# Altium PCB MotherBoard.PcbDoc (part 1 of 2)
Units mil, origin at the board's own origin, x right, y up, seen from the top; angles counter-clockwise.
Board outline 4401.57 x 4960.63 mil, 2 copper layers (Top Layer, Bottom Layer), stack 63.356 mil thick; 74 components, 103 nets, 405 pads, 142 vias.
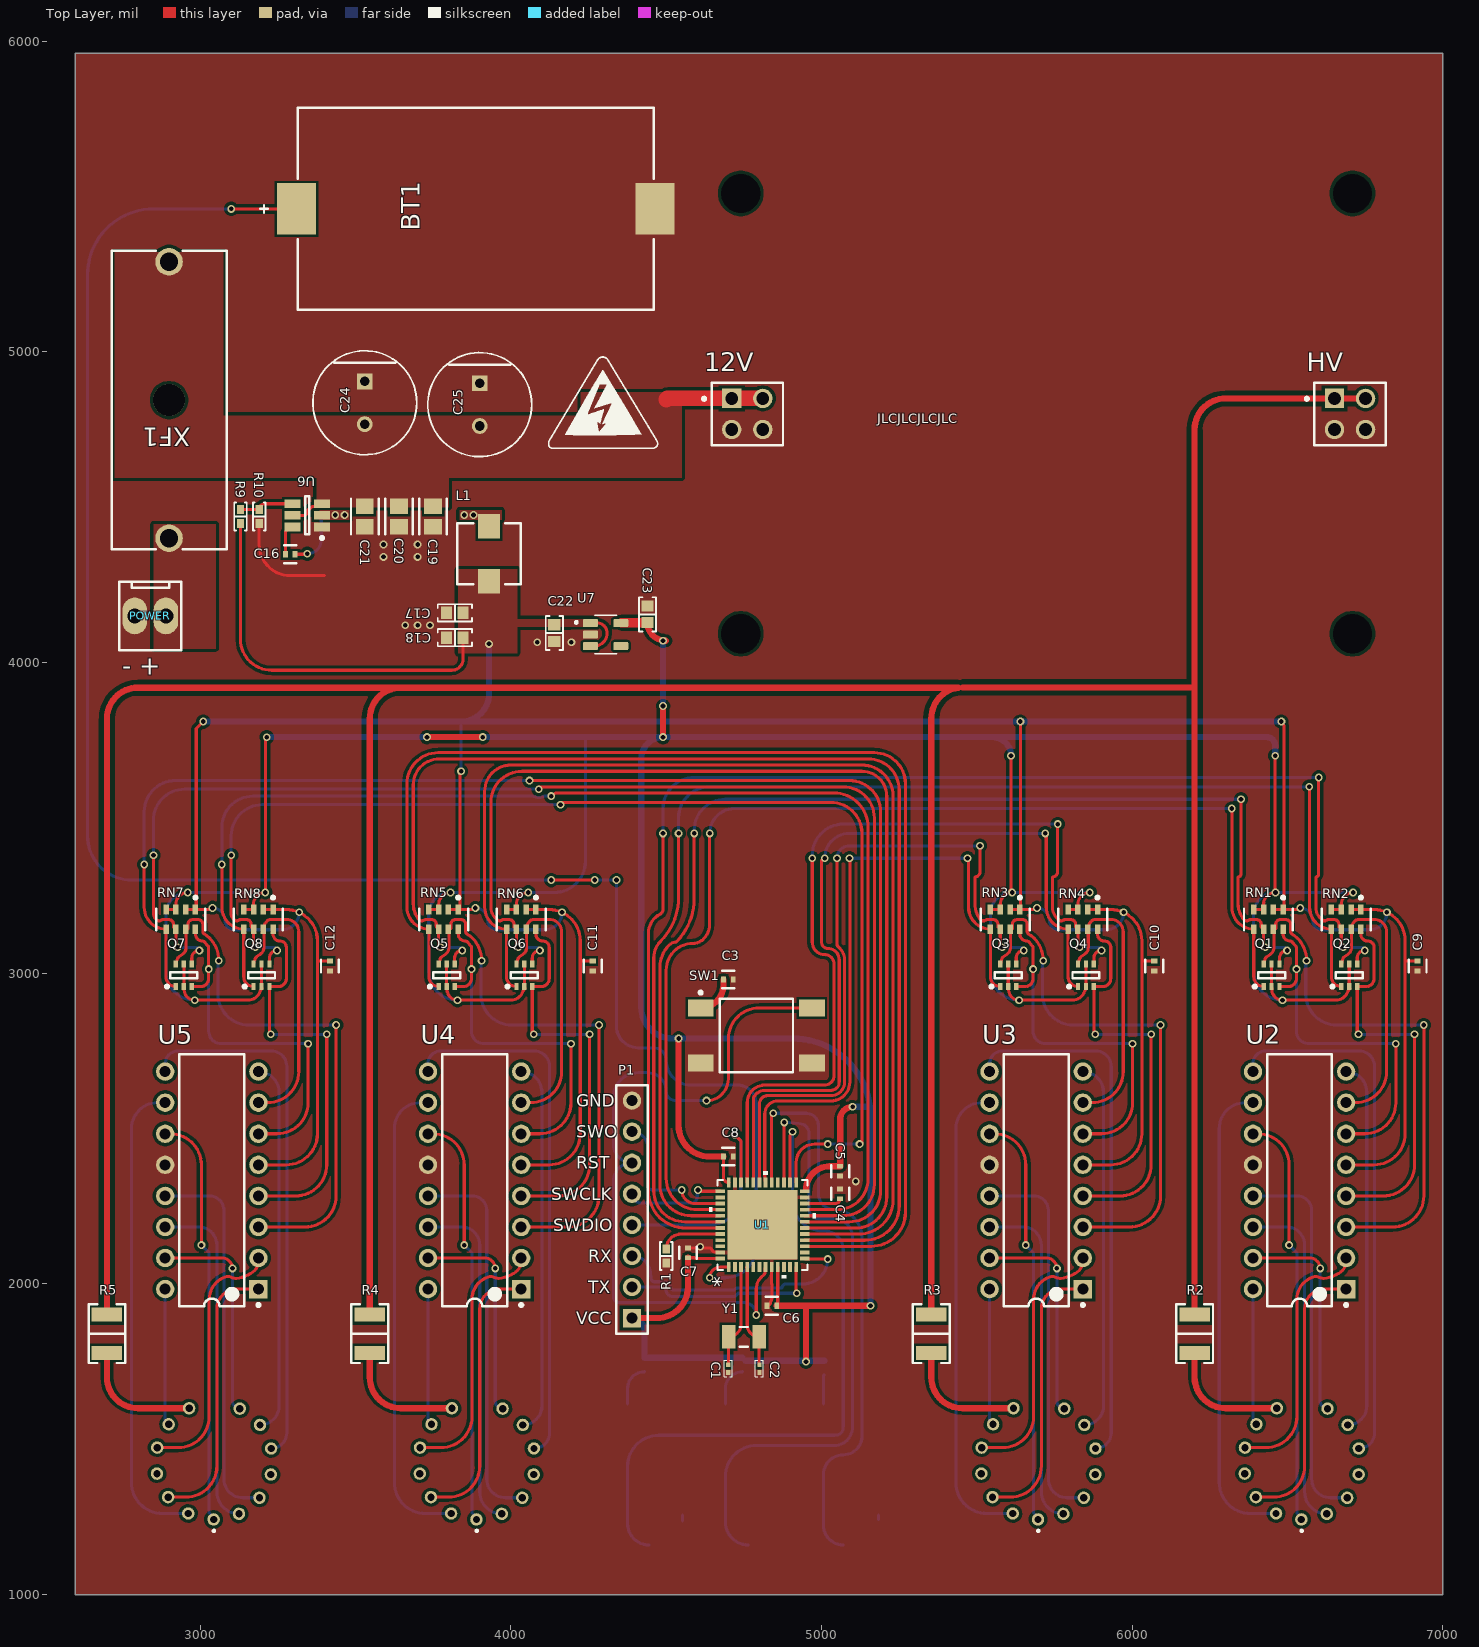
[diagram p0: Top Layer view]
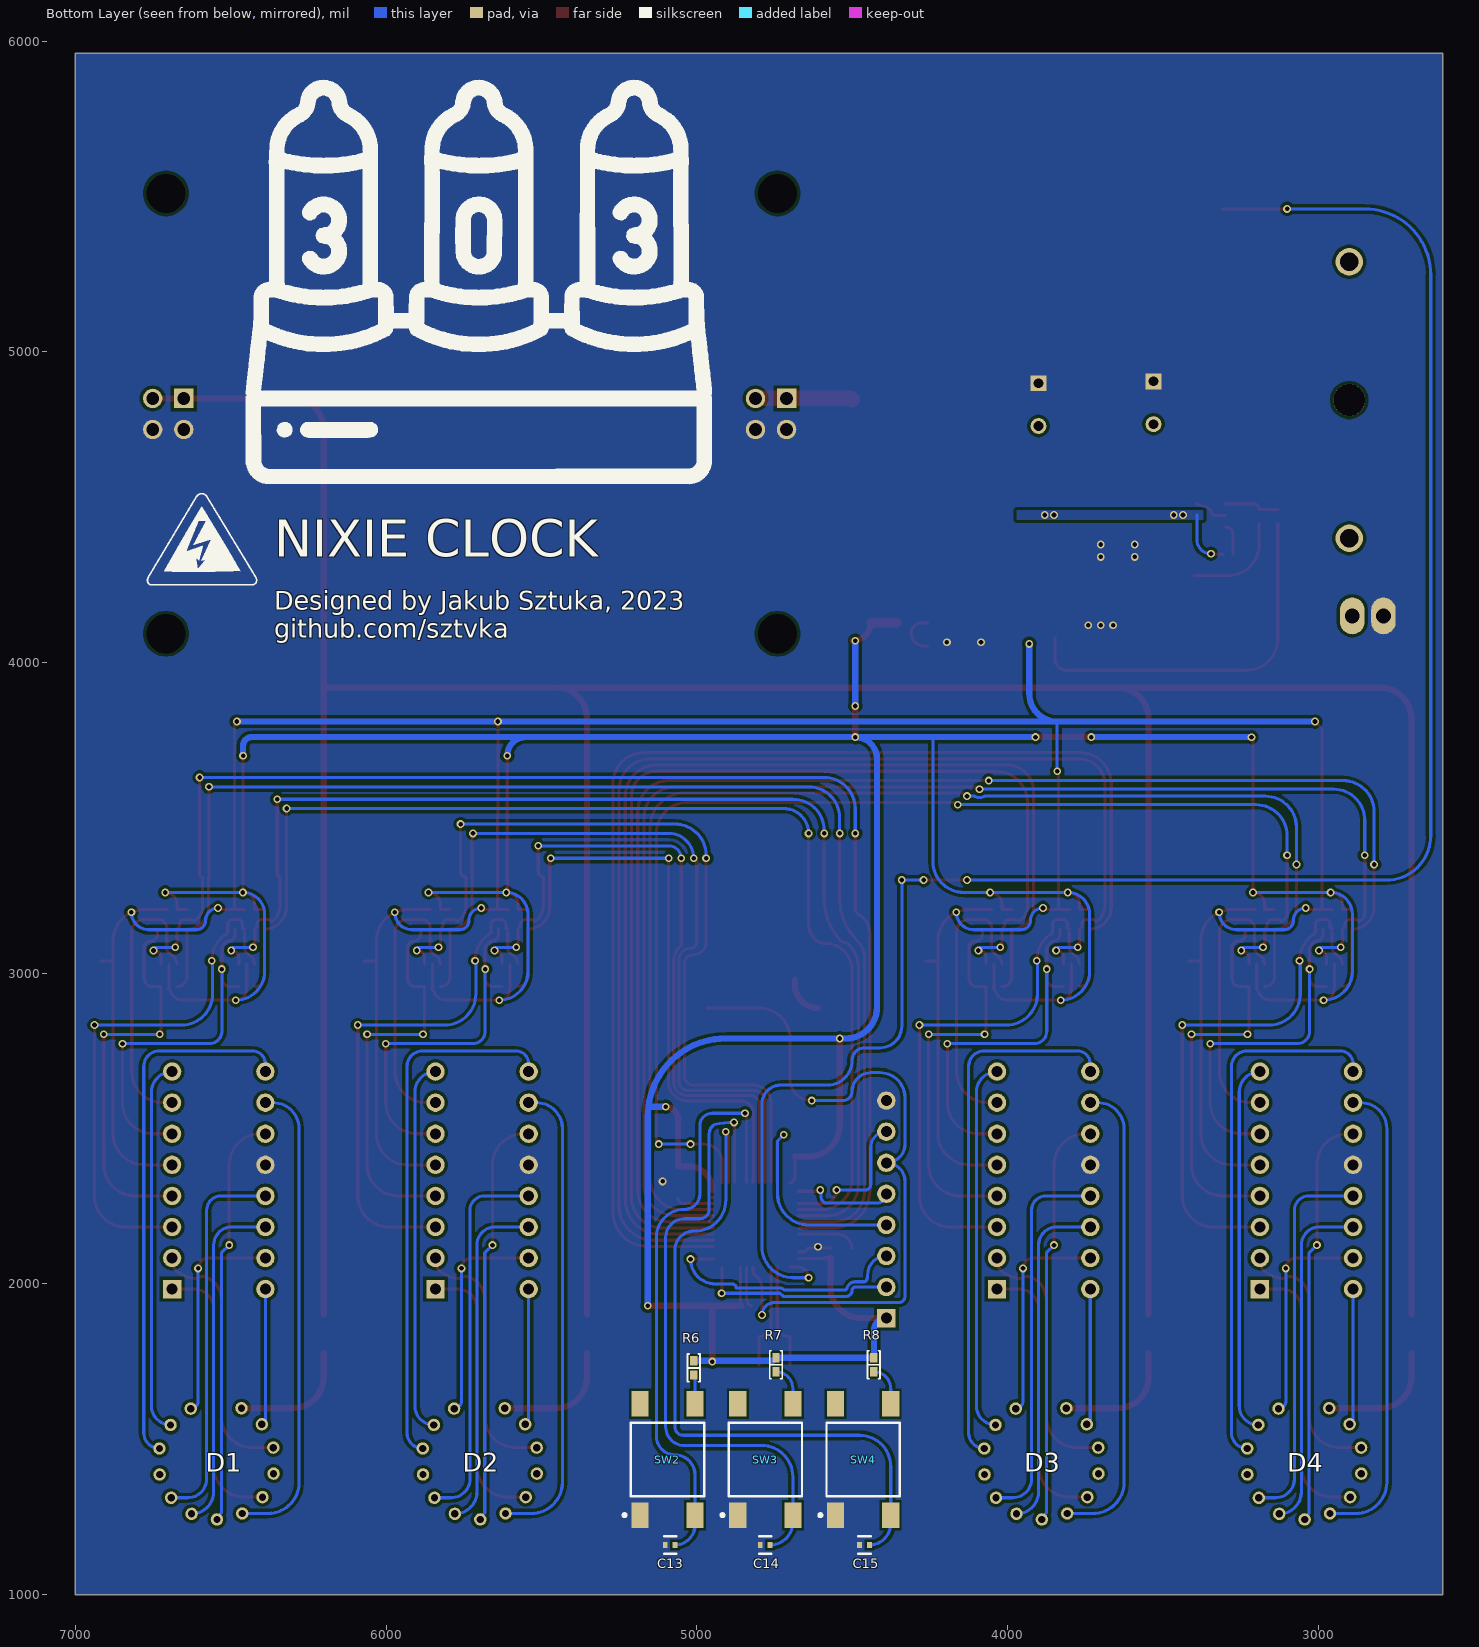
[diagram p1: Bottom Layer view, seen from below]

## Layer stack, top to bottom
Top Solder: solder mask 0.4, Solder Resist, Dk 3.5
Top Layer: signal copper 1.378
Dielectric 2: core 24, Core-038, Dk 4.6
Dielectric 1: dielectric 12.6, FR-4, Dk 4.8
Dielectric 3: core 24, Core-038, Dk 4.6
Bottom Layer: signal copper 1.378
Bottom Solder: solder mask 0.4, Solder Resist, Dk 3.5

## Board outline
2598.43,1000 7000,1000 7000,5960.63 2598.43,5960.63

## Design rules (kind name [scope] priority, off if disabled: settings)
Clearance STM_1 [InComponent('U1') Or InComponentClass('STM32') vs InComponent('U1') Or InComponentClass('STM32')] p1: gap=5 ignorepadtopadclearanceinfootprint=TRUE
Clearance HV_Clearance [(InNet('HV') OR HasFootprint('Z5730M'))] p2: gap=10 ignorepadtopadclearanceinfootprint=FALSE except(0: Arc-Hole Track-Hole SMDPad-Hole THPad-Hole Via-Hole Fill-Hole Poly-Hole Region-Hole Text-Hole; 15: Arc-Arc Arc-Track Arc-SMDPad Arc-THPad Arc-Via Arc-Fill Arc-Poly Arc-Region Track-Track Track-SMDPad Track-THPad Track-Via Track-Fill Track-Poly Track-Region)
Clearance [All] p3: gap=10 ignorepadtopadclearanceinfootprint=FALSE except(0: Arc-Hole Track-Hole SMDPad-Hole THPad-Hole Via-Hole Fill-Hole Poly-Hole Region-Hole Text-Hole; 7: Arc-Arc Arc-Track Arc-SMDPad Track-Track Track-SMDPad SMDPad-SMDPad SMDPad-Fill SMDPad-Poly SMDPad-Region; 15: Fill-Text Poly-Text Region-Text)
HoleSize [All] p1: absolutevalues=TRUE maxlimit=500 minlimit=1 maxpercent=80.000 minpercent=20.000
MinimumSolderMaskSliver [All] p1: minsoldermaskwidth=3
PolygonConnect [All] p1: connectstyle=Direct reliefconductorwidth=10 reliefentries=4 polygonreliefangle="90 Angle" airgapwidth=10
RoomDefinition STM32 [InComponentClass('STM32') And Not InComponent('BT1')] p1: confinementstyle=ConfineIn formatcopy=TRUE lockcomponents=FALSE outline 5280,1040 5280,3612.2 4320,3612.2 4320,1040
RoomDefinition STM-BAT [InComponent('BT1')] p2: confinementstyle=ConfineIn formatcopy=TRUE lockcomponents=FALSE outline 3110,5040 4600,5040 4600,5860 3110,5860
RoomDefinition Power [InComponentClass('Power')] p3: confinementstyle=ConfineIn formatcopy=TRUE lockcomponents=FALSE outline 7000,5610 2660,5610 2660,3948.9 7000,3948.9
RoomDefinition NIXIE_3 [InComponentClass('NIXIE_3')] p4: confinementstyle=ConfineIn formatcopy=TRUE lockcomponents=FALSE outline 3475.91,1043.39 4307.17,1043.39 4307.17,3380 3475.91,3380
RoomDefinition NIXIE_4 [InComponentClass('NIXIE_4')] p5: confinementstyle=ConfineIn formatcopy=TRUE lockcomponents=FALSE outline 2630,1043.39 3461.26,1043.39 3461.26,3380 2630,3380
RoomDefinition NIXIE_2 [InComponentClass('NIXIE_2')] p6: confinementstyle=ConfineIn formatcopy=TRUE lockcomponents=FALSE outline 5283.31,1043.39 6114.57,1043.39 6114.57,3380 5283.31,3380
RoomDefinition NIXIE_1 [InComponentClass('NIXIE_1')] p7: confinementstyle=ConfineIn formatcopy=TRUE lockcomponents=FALSE outline 6130.79,1043.39 6962.05,1043.39 6962.05,3380 6130.79,3380
RoutingVias [All] p1: holewidth=15 width=25 viastyle="Through Hole" minholewidth=15 minwidth=25 maxholewidth=28 maxwidth=50
SilkToSilkClearance [All] p1: silktosilkclearance=4
SilkToSolderMaskClearance [IsPad] p1: minsilkscreentomaskgap=3.8 clearancetoexposedcopper=TRUE
SolderMaskExpansion [All] p1: expansion=4 istentingtop=FALSE
Width [All] p1: maxlimit=50 minlimit=10 preferedwidth=10
26 further rules are at their usual default settings.

## Classes and differential pairs
component class STM32: BT1 C1 C2 C3 C4 C5 C6 C7 C8 C13 C14 C15 P1 R1 R6 R7 R8 SW1 SW2 SW3 SW4 U1 Y1
component class Power: 12V C16 C17 C18 C19 C20 C21 C22 C23 C24 C25 HV L1 POWER R9 R10 U6 U7 XF1
component class NIXIE_4: C12 D4 Q7 Q8 R5 RN7 RN8 U5
component class NIXIE_3: C11 D3 Q5 Q6 R4 RN5 RN6 U4
component class NIXIE_2: C10 D2 Q3 Q4 R3 RN3 RN4 U3
component class NIXIE_1: C9 D1 Q1 Q2 R2 RN1 RN2 U2

## Components (designator, comment, footprint, x,y, rotation, side; value= is the part's Value field where it differs from the comment)
12V "SSW-102-02-G-D" FP-SSW-102-02-G-D-MFG 4760.94,4799.92 r180 top (schematic designator J2)
BT1 "CR2032-BS-6-1" FP-BU2032SM-BT-GTR-MFG 3886.77,5460 r0 top
C1 "10 pF" "CAP 0201_0603" 4700,1727.8 r270 top
C2 "10 pF" "CAP 0201_0603" 4800,1727.8 r270 top
C3 "100nF" FP-C1005-050-0_15-MFG 4700,2980 r180 top
C4 "4.7uF" FP-C1005-050-0_15-MFG 5060,2290 r90 top
C5 "100nF" FP-C1005-050-0_15-MFG 5060,2363 r90 top
C6 "100nF" FP-C1005-050-0_15-MFG 4840,1930 r0 top
C7 "100nF" FP-C1005-050-0_15-MFG 4570,2100 r270 top
C8 "100nF" FP-C1005-050-0_15-MFG 4700,2410 r180 top
C9 "100nF" FP-C1005-050-0_15-MFG 6918.43,3023.39 r90 top
C10 "100nF" FP-C1005-050-0_15-MFG 6070.94,3023.39 r90 top
C11 "100nF" FP-C1005-050-0_15-MFG 4263.54,3023.39 r90 top
C12 "100nF" FP-C1005-050-0_15-MFG 3417.64,3023.39 r90 top
C13 "100nF" FP-C1005-050-0_15-MFG 5085.75,1160 r0 bottom
C14 "100nF" FP-C1005-050-0_15-MFG 4780,1160 r0 bottom
C15 "100nF" FP-C1005-050-0_15-MFG 4460,1160 r0 bottom
C16 "100nF" FP-C1005-050-0_15-MFG 3290,4348.42 r0 top
C17 "22uF" "CAP 0603_1608" 3820,4160 r0 top
C18 "22uF" "CAP 0603_1608" 3820,4080 r0 top
C19 "10uF" FP-CL21-IPC_B 3750,4470 r270 top
C20 "10uF" FP-CL21-IPC_B 3640,4470 r270 top
C21 "10uF" FP-CL21-IPC_B 3530,4470 r270 top
C22 "1uF" "CAP 0603_1608" 4140,4095 r90 top
C23 "1uF" "CAP 0603_1608" 4440,4155 r270 top
C24 "470uF" FP-RAD-TH-D_8_0_5-L_15_1-MFG 3530,4836.09 r270 top
C25 "470uF" FP-RAD-TH-D_8_0_5-L_15_1-MFG 3900,4830 r270 top
D1 "Z5730M" Z5730M 6545.65,1430.08 r180 bottom
D2 "Z5730M" Z5730M 5698.17,1430.08 r180 bottom
D3 "Z5730M" Z5730M 3890.77,1430.08 r180 bottom
D4 "Z5730M" Z5730M 3044.86,1430.08 r180 bottom
HV "SSW-102-02-G-D" FP-SSW-102-02-G-D-MFG 6700.94,4799.92 r180 top (schematic designator J1)
L1 "3.3 µH" "BOURNS SRP5030T" 3930,4350 r270 top
P1 "Header 8" HDR1X8 4390,1890 r90 top
POWER "POWER" "MOLEX KK 0022272021" 2840,4150 r180 top (schematic designator J3)
Q1 "PMGD780SN,115" NXP-SOT363_N 6448.43,2993.39 r90 top
Q2 "PMGD780SN,115" NXP-SOT363_N 6698.43,2993.39 r90 top
Q3 "PMGD780SN,115" NXP-SOT363_N 5600.94,2993.39 r90 top
Q4 "PMGD780SN,115" NXP-SOT363_N 5850.94,2993.39 r90 top
Q5 "PMGD780SN,115" NXP-SOT363_N 3793.54,2993.39 r90 top
Q6 "PMGD780SN,115" NXP-SOT363_N 4043.54,2993.39 r90 top
Q7 "PMGD780SN,115" NXP-SOT363_N 2947.64,2993.39 r90 top
Q8 "PMGD780SN,115" NXP-SOT363_N 3197.64,2993.39 r90 top
R1 "10 kOhms" "RES 0402_1005" 4500,2090 r90 top
R2 "20 kOhms" "RES 1210_3225" 6200.79,1840 r270 top
R3 "20 kOhms" "RES 1210_3225" 5353.31,1840 r270 top
R4 "20 kOhms" "RES 1210_3225" 3545.91,1840 r270 top
R5 "20 kOhms" "RES 1210_3225" 2700,1840 r270 top
R6 "10 kOhms" "RES 0402_1005" 5010,1730 r90 bottom
R7 "10 kOhms" "RES 0402_1005" 4745,1740 r90 bottom
R8 "10 kOhms" "RES 0402_1005" 4430,1740 r90 bottom
R9 "56.2 kOhms" "RES 0402_1005" 3130,4470 r270 top
R10 "10 kOhms" "RES 0402_1005" 3190,4470 r90 top
RN1 "10k 0603x4" FP-EXB38V-MFG 6438.43,3173.39 r180 top
RN2 "10k 0603x4" FP-EXB38V-MFG 6688.43,3173.39 r180 top
RN3 "10k 0603x4" FP-EXB38V-MFG 5590.94,3173.39 r180 top
RN4 "10k 0603x4" FP-EXB38V-MFG 5840.94,3173.39 r180 top
RN5 "10k 0603x4" FP-EXB38V-MFG 3783.54,3173.39 r180 top
RN6 "10k 0603x4" FP-EXB38V-MFG 4033.54,3173.39 r180 top
RN7 "10k 0603x4" FP-EXB38V-MFG 2937.64,3173.39 r180 top
RN8 "10k 0603x4" FP-EXB38V-MFG 3187.64,3173.39 r180 top
SW1 "FSM6JSMA" TECO-FSM6JSMA_V 4790,2800 r90 top
SW2 "FSM6JSMA" TECO-FSM6JSMA_V 5094.41,1435 r0 bottom
SW3 "FSM6JSMA" TECO-FSM6JSMA_V 4779.41,1435 r0 bottom
SW4 "FSM6JSMA" TECO-FSM6JSMA_V 4464.41,1435 r0 bottom
U1 "STM32F411CCU6TR" UFQFPN-48_7X7X0P55MM 4810,2190 r90 top
U2 "74141" DIP-16 6538.43,2333.39 r180 top
U3 "74141" DIP-16 5690.94,2333.39 r180 top
U4 "74141" DIP-16 3883.54,2333.39 r180 top
U5 "74141" DIP-16 3037.64,2333.39 r180 top
U6 "TPS563201DDCR" SOT23-6_M 3345,4473.58 r180 top
U7 "RT9013-33GB" RT9013 4305,4090 r0 top
XF1 "PTF-77" 696107003002 2900,4844.88 r90 top
Y1 "ABS07-32.768KHZ-7-T" FP-ABS07-MFG 4750,1830 r180 top

## Footprints (in the part's own frame and the unit in brackets; to place one, negate y for a bottom-side part, rotate by r counter-clockwise, add the part's x,y. Pads: shape width x height; smd on the part's side, far side on the other; paste and mask are expansions set on the pad)
696107003002 [mm] "FUSEHOLDER BLOCKS - PCB - CLIP COVER - THT"
  round 2.25 hole 1.5: 1(-11.3,0) 2(11.3,0)
  round 2.6 hole 2.6 unplated: MH1(0,0)
  silkscreen extent -12.2,-4.7 12.2,4.7, body extent -12.2,-4.7 12.2,4.7, height 11.55
"BOURNS SRP5030T" [mm] "Precision Wire Wound Inductor, 2-Leads, Body 5.70x5.20mm, IPC Medium Density"
  rect 2x1.8 smd: 1(-2.25,0) 2(2.25,0)
  silkscreen extent -2.5,-2.6 2.5,2.6, body extent -2.85,-2.6 2.85,2.6, height 3
"CAP 0201_0603" [mm] "Chip Capacitor, 2-Leads, Body 0.60x0.30mm, IPC Medium Density"
  rect 0.4x0.35 smd: 1(-0.31,0) 2(0.31,0)
  silkscreen extent -0.67,-0.33 0.67,0.33, body extent -0.3,-0.15 0.3,0.15, height 0.3
"CAP 0603_1608" [mm] "Chip Capacitor, 2-Leads, Body 1.60x0.80mm, IPC Medium Density"
  rect 0.9x1 smd: 1(-0.675,0) 2(0.675,0)
  silkscreen extent -1.4,-0.7 1.4,0.7, body extent -0.8,-0.41 0.8,0.41, height 0.82
DIP-16 [mm] "DIP; 16 Leads; Row Spacing 7.62 mm; Pitch 2.54 mm"
  rect 1.5x1.5 hole 0.9: 1(-3.81,8.89)
  round 1.5 hole 0.9: 2(-3.81,6.35) 3(-3.81,3.81) 4(-3.81,1.27) 5(-3.81,-1.27) 6(-3.81,-3.81) 7(-3.81,-6.35) 8(-3.81,-8.89) 9(3.81,-8.89) 10(3.81,-6.35) 11(3.81,-3.81) 12(3.81,-1.27) 13(3.81,1.27) 14(3.81,3.81) 15(3.81,6.35) 16(3.81,8.89)
  silkscreen extent -3.94,-10.3 2.65,10.31, body extent -3.6,-10.28 3.6,10.28, height 5.08
FP-ABS07-MFG [mm]
  rect 1.1x1.9 smd paste+0 mask+0: 1(-1.25,0) 2(1.25,0)
  silkscreen extent -0.33,-0.8 0.33,0.8, body extent -1.9,-1.05 1.9,1.05, height 0.25
FP-BU2032SM-BT-GTR-MFG [mm]
  rect 3.2x4.2 smd paste+0 mask+0: 1(14.65,0) 2(-14.65,0)
  silkscreen extent -17.6,-8.25 14.55,8.25, body extent -16.35,-8.35 16.35,8.35, height 0.25
FP-C1005-050-0_15-MFG [mm]
  rect 0.4x0.5 smd paste+0 mask+0: 1(-0.4,0) 2(0.4,0)
  silkscreen extent -0.5,-0.72 0.5,0.72, body extent -0.7,-0.43 0.7,0.43, height 0.25
FP-CL21-IPC_B [mil]
  rect 49.4x57.33 smd paste+0 mask+0: 1(-32.51,0) 2(32.51,0)
  silkscreen extent -57,-44 57,44, body extent -67,-39 67,39, height 10
FP-EXB38V-MFG [mm]
  rect 0.45x0.8 smd paste+0 mask+0: 1(-1.2,-0.8) 2(-0.4,-0.8) 3(0.4,-0.8) 4(1.2,-0.8) 5(1.2,0.8) 6(0.4,0.8) 7(-0.4,0.8) 8(-1.2,0.8)
  silkscreen extent -2,-1.9 2,0.87, body extent -1.8,-1.3 1.8,1.3, height 0.25
FP-RAD-TH-D_8_0_5-L_15_1-MFG [mm]
  rect 1.3x1.3 hole 0.8 paste-1000 mask+0: 1(-1.75,0)
  round 1.3 hole 0.8 paste-1000 mask+0: 2(1.75,0)
  silkscreen extent -4.25,-4.25 4.25,4.25, body extent -4.35,-4.35 4.35,4.35, height 0.25
FP-SSW-102-02-G-D-MFG [mm]
  rect 1.59x1.59 hole 1.04 paste-1000 mask+0: 1(1.27,-1.27)
  round 1.59 hole 1.04 paste-1000 mask+0: 2(1.27,1.27) 3(-1.27,-1.27) 4(-1.27,1.27)
  silkscreen extent -2.92,-2.54 3.65,2.54, body extent -3.02,-2.64 3.02,2.64, height 0.25
HDR1X8 [mm] "Connector; Header; 8 Position"
  rect 1.5x1.5 hole 0.9: 1(0,0)
  round 1.5 hole 0.9: 2(2.54,0) 3(5.08,0) 4(7.62,0) 5(10.16,0) 6(12.7,0) 7(15.24,0) 8(17.78,0)
  silkscreen extent -1.27,-1.27 19.05,1.27
"MOLEX KK 0022272021" [mm]
  oval 2x3 hole 1.2: 1(-1.27,0) 2(1.27,0)
  silkscreen extent -2.54,-2.79 2.54,2.79, body extent -2.54,-2.9 2.54,2.9, height 11.7
NXP-SOT363_N [mm] "SOT23, 6-Leads, Body 2.2x1.35mm, Pitch 0.65mm, IPC Medium Density"
  rect 0.55x0.35 smd: 1(-0.925,0.65) 2(-0.925,0) 3(-0.925,-0.65) 4(0.925,-0.65) 5(0.925,0) 6(0.925,0.65)
  silkscreen extent -1.05,-1.1 0.25,1.5, body extent -0.67,-1.1 0.67,1.1, height 1.1
"RES 0402_1005" [mm] "Chip Resistor, 2-Leads, Body 1.0x0.5mm, IPC Medium Density"
  rect 0.75x0.6 smd: 1(-0.575,0) 2(0.575,0)
  silkscreen extent -1.14,-0.51 1.14,0.51, body extent -0.5,-0.25 0.5,0.25, height 0.35
"RES 1210_3225" [mm] "Chip Resistor, 2-Leads, Body 3.1x2.6mm, IPC Medium Density"
  rect 1.15x2.5 smd: 1(-1.575,0) 2(1.575,0)
  silkscreen extent -2.4,-1.5 2.4,1.5, body extent -1.6,-1.25 1.6,1.25, height 0.7
RT9013 [mm]
  rrect25% 1.22x0.65 smd: 1(-1.245,0.94) 2(-1.245,0) 3(-1.245,-0.94) 4(1.245,-0.94) 5(1.245,0.94)
  silkscreen extent -2.5,-1.58 0.9,1.58
SOT23-6_M [mm] "SOT23, 6-Leads, Body 2.9x1.6mm, Pitch 0.95mm, Lead Span 2.7mm, IPC Low Density"
  rect 1.3x0.7 smd: 1(-1.2,0.95) 2(-1.2,0) 3(-1.2,-0.95) 4(1.2,-0.95) 5(1.2,0) 6(1.2,0.95)
  silkscreen extent -1.33,-1.55 0.15,1.97, body extent -0.9,-1.55 0.9,1.55, height 1.45
TECO-FSM6JSMA_V [mm] "SMD, 4-Leads, Body 6x6mm, Pitch 4.5mm"
  rect 1.4x2.1 smd: 1(2.25,4.55) 2(2.25,-4.55) 3(-2.25,4.55) 4(-2.25,-4.55)
  silkscreen extent -3,-3 3.62,4.67, body extent -3,-5 3,5, height 7.11
UFQFPN-48_7X7X0P55MM [mil]
  rect 32x12 smd paste+0 mask+0: 1(-136,108.27) 2(-136,88.58) 3(-136,68.9) 4(-136,49.21) 5(-136,29.53) 6(-136,9.84) 7(-136,-9.84) 8(-136,-29.53) 9(-136,-49.21) 10(-136,-68.9) 11(-136,-88.58) 12(-136,-108.27) 25(136,-108.27) 26(136,-88.58) 27(136,-68.9) 28(136,-49.21) 29(136,-29.53) 30(136,-9.84) 31(136,9.84) 32(136,29.53) 33(136,49.21) 34(136,68.9) 35(136,88.58) 36(136,108.27)
  rect 12x32 smd paste+0 mask+0: 13(-108.27,-136) 14(-88.58,-136) 15(-68.9,-136) 16(-49.21,-136) 17(-29.53,-136) 18(-9.84,-136) 19(9.84,-136) 20(29.53,-136) 21(49.21,-136) 22(68.9,-136) 23(88.58,-136) 24(108.27,-136) 37(108.27,136) 38(88.58,136) 39(68.9,136) 40(49.21,136) 41(29.53,136) 42(9.84,136) 43(-9.84,136) 44(-29.53,136) 45(-49.21,136) 46(-68.9,136) 47(-88.58,136) 48(-108.27,136)
  rect 224x224 smd paste-111.5 mask+0: 49(0,0)
  silkscreen extent -172,-172 172,172, body extent -140,-140 140,140, height 24
Z5730M [mil]
  round 40 hole 23.62: 1(-82.84,168.76) 2(-147.86,116.11) 3(-183.6,40.45) 4(-182.97,-43.21) 5(-146.1,-118.32) 6(-80.3,-169.99) 7(1.41,-187.99) 8(82.84,-168.77) 9(147.86,-116.11) 10(183.6,-40.46) 11(182.97,43.2) 12(146.1,118.31) 13(80.29,169.99)

## Part data
12V HV: library part CMP-02766-000581-1, "CONN RCPT 4POS 0.1 GOLD PCB", Color=Black, Current Rating=6.9A, Voltage Rating=550V, Connector Type=Receptacle, Contact Material=Bronze, Contact Plating=Gold, Gender=Receptacle, Housing Color=Black, Housing Material=Plastic, Lead Free="Lead Free", Mating Cycles=100, Mount="Through Hole", Number of Contacts=4, Number of Positions=4, Number of Rows=2, Orientation=Straight, Packaging=Bulk, Pitch=2.54mm, Radiation Hardening=No, REACH SVHC="No SVHC", Row Spacing=0.1inch, Termination=Solder
BT1: library part CMP-136216-000002-1, Case/Package=SMD/SMT, Max Operating Temperature=280°C, Min Operating Temperature=-40°C, Package Quantity=400, Mount="Surface Mount", Number of Cells=1, Termination=SMD/SMT
C1 C2: library part C0201C100J3GAC7867, "CAP CER 10PF 25V C0G/NP0 0201", Device Package="0201 (0603 Metric)", manufacturer=KEMET, Operating Temperature="-55°C ~ 125°C", Supplier Part Number 1=399-14856-1-ND, Temperature Coefficient="C0G, NP0", Tolerance=±5%, Voltage - Rated=25V, Applications="General Purpose", Capacitance="10 pF", componentlink1description=Datasheet, componentlink1url=https://api.kemet.com/component-edge/download/datasheet/C0201C100J3GAC7867.pdf, componentlink2description="DigiKey Link", componentlink2url=https://www.digikey.com/en/products/detail/kemet/C0201C100J3GAC7867/7381972, Features="Low ESL", lastupdated="13.03.2023 19:01:22", Lifecycle Status=Active, Minimum Order=1, Mounting Type="Surface Mount, MLCC", Package / Case="0201 (0603 Metric)", Packaging=TapeAndReel, Part Number=C0201C100J3GAC7867, Part Status=Active, partid=4, price=0.02, Series="SMD Comm C0G", Size / Dimension="0.024\" L x 0.012\" W (0.60mm x 0.30mm)", Supplier 1=DigiKey, Thickness (Max)="0.013\" (0.33mm)"
C3 C5 C6 C7 C8 C9 C10 C11 C12 C13 C14 C15 C16: library part CMP-2000-05438-2, "CAP CER 100nF 10V X5R 0402", Capacitance=4.7uF, Case Code (Imperial)=0402, Case Code (Metric)=1005, Dielectric=X5R, Dielectric Material=Ceramic, Max Operating Temperature=85°C, Min Operating Temperature=-55°C, Package Quantity=1, Tolerance=20%, Voltage=10V, Case/Package=0402, Construction=Flat, Depth=0.5mm, Height=0.5mm, Lead Free="Lead Free", Length=1mm, Mount="Surface Mount", Packaging="Tape and Reel", Radiation Hardening=No, REACH SVHC="No SVHC", Resistor Type=Ceramic, RoHS Compliant=Yes, Series=C, Termination=SMD/SMT, Thickness=500um, Voltage Rating=10V, Voltage Rating (DC)=10V, Weight=2.3E-05oz, Width=0.02inch
C4: library part CMP-2000-05438-2, "CAP CER 4.7UF 10V X5R 0402", Case Code (Imperial)=0402, Case Code (Metric)=1005, Dielectric=X5R, Dielectric Material=Ceramic, Max Operating Temperature=85°C, Min Operating Temperature=-55°C, Package Quantity=1, Tolerance=20%, Voltage=10V, Capacitance=4.7uF, Case/Package=0402, Construction=Flat, Depth=0.5mm, Height=0.5mm, Lead Free="Lead Free", Length=1mm, Mount="Surface Mount", Packaging="Tape and Reel", Radiation Hardening=No, REACH SVHC="No SVHC", Resistor Type=Ceramic, RoHS Compliant=Yes, Series=C, Termination=SMD/SMT, Thickness=500um, Voltage Rating=10V, Voltage Rating (DC)=10V, Weight=2.3E-05oz, Width=0.02inch
C17 C18 C22 C23: library part C0603C272F3GAC7867, "CL10A226MP8NUNE", Device Package="0603 (1608 Metric)", manufacturer=KEMET, Operating Temperature="-55°C ~ 125°C", Supplier Part Number 1=399-17403-1-ND, Temperature Coefficient="C0G, NP0", Tolerance=±1%, Voltage - Rated=25V, Applications="General Purpose", componentlink1description=Datasheet, componentlink1url=https://api.kemet.com/component-edge/download/datasheet/C0603C272F3GACTU.pdf, componentlink2description="DigiKey Link", componentlink2url=https://www.digikey.com/en/products/detail/kemet/C0603C272F3GAC7867/2200413, Features="Low ESL", lastupdated="22.03.2023 19:09:03", Lifecycle Status=Active, Minimum Order=1, Mounting Type="Surface Mount, MLCC", Package / Case="0603 (1608 Metric)", Packaging=TapeAndReel, Part Number=C0603C272F3GAC7867, Part Status=Active, partid=2138, price=0.42, Series="SMD Comm C0G", Size / Dimension="0.063\" L x 0.031\" W (1.60mm x 0.80mm)", Supplier 1=DigiKey, Thickness (Max)="0.034\" (0.87mm)"
  C17 C18: Capacitance=22uF
  C22 C23: Capacitance=1uF
C19 C20 C21: library part CMP-2000-06102-2, "CL21 Series 0805 10uF 16V ±10% Tolerance X5R Multilayer Ceramic Chip Capacitor", Case Code (Imperial)=0805, Case Code (Metric)=2012, Dielectric=X7R, Max Operating Temperature=85°C, Min Operating Temperature=-55°C, Package Quantity=1, Tolerance=10%, Voltage=16V, Capacitance=10uF, Case/Package=0805, Depth=1.25mm, Height=1.25mm, Lead Free="Lead Free", Length=2mm, Mount="Surface Mount", Packaging="Tape and Reel", Radiation Hardening=No, Thickness=0.055inch, Voltage Rating=16V, Voltage Rating (DC)=16V, Width=0.049inch
C24 C25: library part CMP-05427-000701-1, "EEUFM1C471L", Case/Package=Radial, ESR (Equivalent Series Resistance)=45mR, Max Operating Temperature=105°C, Min Operating Temperature=-40°C, Package Quantity=1, Ripple Current=1.14A, Tolerance=20%, Voltage Rating=50V, Capacitance=470uF, Diameter=8mm, Features="General Purpose", Height=15mm, Height - Seated (Max)=0.65inch, Impedance=45mR, Lead Diameter=0.6mm, Lead Free="Lead Free", Lead Pitch=5mm, Length=15mm, Life (Hours)=8000Hour, Mount="Through Hole", Packaging="Tape and Reel", Polarity=Polar, Radiation Hardening=No, REACH SVHC=Yes, RoHS Compliant=Yes, Series=FR, Termination=Radial, Voltage Rating (DC)=50V, Weight=0.102365oz
L1: library part SRP5030T-4R7M, "MDA5030-3R3M", Current - Saturation=6A, Current Rating (Amps)="4.6 A", DC Resistance (DCR)="53mOhm Max", Device Package=Nonstandard, Inductance="4.7 µH", Inductance Frequency - Test="100 kHz", manufacturer="Bourns Inc.", Operating Temperature="-40°C ~ 125°C", Supplier Part Number 1=SRP5030T-4R7MCT-ND, Tolerance=±20%, componentlink1description=Datasheet, componentlink1url=https://www.bourns.com/docs/Product-Datasheets/SRP5030T.pdf, componentlink2description="DigiKey Link", componentlink2url=https://www.digikey.com/en/products/detail/bourns-inc/SRP5030T-4R7M/3986084, Height - Seated (Max)="0.118\" (3.00mm)", lastupdated="22.03.2023 20:00:38", Lifecycle Status=Active, Material - Core="Iron Powder", Minimum Order=1, Mounting Type="Surface Mount", Package / Case=Nonstandard, Packaging=TapeAndReel, Part Number=SRP5030T-4R7M, Part Status=Active, partid=1, price=0.61, Series=SRP5030T, Shielding=Shielded, Size / Dimension="0.224\" L x 0.205\" W (5.70mm x 5.20mm)", Supplier 1=DigiKey, Type="Drum Core, Wirewound"
P1: "Header, 8-Pin", LatestRevisionDate=17-Jul-2002, LatestRevisionNote="Re-released for DXP Platform.", Publisher="Altium Limited"
POWER: library part 0022272021, "CONN HEADER VERT 2POS 2.54MM", Insulation Color=Natural, manufacturer=Molex, Material Flammability Rating="UL94 V-0", Supplier Part Number 1=WM4111-ND, componentlink1description=Datasheet, componentlink1url=https://www.molex.com/pdm_docs/sd/022272021_sd.pdf, componentlink2description="DigiKey Link", componentlink2url=http://digikey.com/product-detail/en/molex/0022272021/WM4111-ND/1130577, Connector Type=Header, Contact Finish - Mating=Tin, Contact Finish - Post=Tin, Contact Finish Thickness - Mating="100.0µin (2.54µm)", Contact Length - Mating="0.295\" (7.49mm)", Contact Length - Post="0.140\" (3.56mm)", Contact Material=Brass, Contact Shape=Square, Contact Type="Male Pin", Fastening Type="Friction Lock", Insulation Height="0.461\" (11.70mm)", Insulation Material="Polyamide (PA), Nylon", lastupdated="12.01.2020 23:51:43", Lifecycle Status=Active, Minimum Order=1, Mounting Type="Through Hole", Number of Positions=2, Number of Positions Loaded=All, Number of Rows=1, Overall Contact Length="0.560\" (14.22mm)", Packaging=Bulk, Part Number=0022272021, Part Status=Active, partid=76, Pitch - Mating="0.100\" (2.54mm)", price=0.27, Series="KK 6410", Shrouding="Shrouded - 1 Wall", Style="Board to Cable/Wire", Supplier 1=DigiKey, Termination=Solder
Q1 Q2 Q3 Q4 Q5 Q6 Q7 Q8: library part CMP-1258-00177-1, "Dual N-Channel uTrenchMOS Standard Level FET, 60 V, 0.49 A, 6-Pin SOT363, Tape and Reel", manufacturer="NXP Semiconductors", Channel Type=N, Ciss [typ] (pF)=23, Code_JEITA=SC-88, componentlink1description="Manufacturer URL", componentlink1url=http://www.nxp.com/, componentlink2description=Datasheet, componentlink2url=http://www.nxp.com/documents/data_sheet/PMGD780SN.pdf, ComponentLink3Description="Package Specification", ComponentLink3URL=http://www.nxp.com/documents/outline_drawing/sot363_po.pdf, Coss [typ] (pF)=5, DatasheetVersion="Rev. 02", ID [max] (A)=0.49, Mounting Technology="Surface Mount", PackageDescription="6-Pin Small Outline Transistor Package, Body 2 x 1.25 mm, Pitch 0.65 mm", PackageReference=SOT363, PackageVersion="06-03-16, 03/2006", Packing="Tape & Reel", PartNumber=PMGD780SN,115, VDS [max] (V)=60, VGSth [typ] (V)=2
R1 R6 R7 R8: library part TNPW040210K0BETD, "RES 10K OHM 1% 1/16W 0402", Device Package="0402 (1005 Metric)", manufacturer="Vishay Dale", Operating Temperature="-55°C ~ 125°C", Power (Watts)="0.063W, 1/16W", Supplier Device Package=0402, Supplier Part Number 1=541-3559-1-ND, Temperature Coefficient=±25ppm/°C, Tolerance=±0.1%, componentlink1description=Datasheet, componentlink1url=http://www.vishay.com/docs/31006/tnpw.pdf, componentlink2description="DigiKey Link", componentlink2url=https://www.digikey.com/en/products/detail/vishay-dale/TNPW040210K0BETD/1613222, Composition="Thin Film", Features=Military, Height - Seated (Max)="0.016\" (0.40mm)", lastupdated="13.03.2023 19:23:30", Lifecycle Status=Active, Minimum Order=1, Number of Terminations=2, Package / Case="0402 (1005 Metric)", Packaging=TapeAndReel, Part Number=TNPW040210K0BETD, Part Status=Active, partid=3021, price=0.25, Resistance="10 kOhms", Series=TNPW, Size / Dimension="0.039\" L x 0.020\" W (1.00mm x 0.50mm)", Supplier 1=DigiKey
R2 R3 R4 R5: library part CRCW121020K0FKEAHP, "RES SMD 20K OHM 1% 3/4W 1210", Device Package="1210 (3225 Metric)", manufacturer="Vishay Dale", Operating Temperature="-55°C ~ 155°C", Power (Watts)="0.75W, 3/4W", Ratings=AEC-Q200, Supplier Device Package=1210, Supplier Part Number 1=541-20.0KDCT-ND, Temperature Coefficient=±100ppm/°C, Tolerance=±1%, componentlink1description=Datasheet, componentlink1url=http://www.vishay.com/docs/20043/crcwhpe3.pdf, componentlink2description="DigiKey Link", componentlink2url=http://digikey.com/product-detail/en/vishay-dale/CRCW121020K0FKEAHP/541-20.0KDCT-ND/2567330, Composition="Thick Film", Features="Automotive AEC-Q200, Pulse Withstanding", Height - Seated (Max)="0.028\" (0.70mm)", lastupdated="27.03.2023 20:03:38", Lifecycle Status=Active, Minimum Order=1, Number of Terminations=2, Package / Case="1210 (3225 Metric)", Packaging=TapeAndReel, Part Number=CRCW121020K0FKEAHP, Part Status=Active, price=0.07, Resistance="20 kOhms", Series=CRCW-HP, Size / Dimension="0.126\" L x 0.098\" W (3.20mm x 2.50mm)", Supplier 1=DigiKey
R9 R10: library part RC0402FR-07110KL, "RES 110K OHM 1% 1/16W 0402", Device Package="0402 (1005 Metric)", manufacturer=Yageo, Operating Temperature="-55°C ~ 155°C", Power (Watts)="0.063W, 1/16W", Supplier Device Package=0402, Supplier Part Number 1=311-110KLRCT-ND, Temperature Coefficient=±100ppm/°C, Tolerance=±1%, componentlink1description=Datasheet, componentlink1url=https://www.yageo.com/upload/media/product/productsearch/datasheet/rchip/PYu-RC_Group_51_RoHS_L_10.pdf, componentlink2description="DigiKey Link", componentlink2url=https://www.digikey.com/en/products/detail/yageo/RC0402FR-07110KL/726531, Composition="Thick Film", Features="Moisture Resistant", Height - Seated (Max)="0.016\" (0.40mm)", lastupdated="22.03.2023 19:23:12", Lifecycle Status=Active, Minimum Order=1, Number of Terminations=2, Package / Case="0402 (1005 Metric)", Packaging=CutTape, Part Number=RC0402FR-07110KL, Part Status=Active, partid=2713, price=0.01, Series=RC_L, Size / Dimension="0.039\" L x 0.020\" W (1.00mm x 0.50mm)", Supplier 1=DigiKey
  R9: Resistance="56.2 kOhms"
  R10: Resistance="10 kOhms"
RN1 RN2 RN3 RN4 RN5 RN6 RN7 RN8: library part CMP-2000-05314-2, "RES ARRAY 4 RES 10K OHM 1206 / RC-ML08W103JT", Case Code (Imperial)=1206, Case Code (Metric)=3216, Max Operating Temperature=125°C, Min Operating Temperature=-55°C, Number of Resistors=4, Package Quantity=1, Power Dissipation=63mW, Power Per Element=62.5mW, Resistance=10kR, Resistance Tolerance=5%, Temperature Coefficient=200ppm/°C, Voltage Rating=50V, Voltage Rating (DC)=100V, Case/Package=1206, Circuit Type=Isolated, Contact Plating=Tin, Depth=1.6mm, Height=0.5mm, Lead Free="Lead Free", Length=3.2mm, Military Standard=Not, Mount="Surface Mount", Number of Contacts=8, Number of Elements=4, Number of Pins=8, Number of Terminals/Pins=8, Packaging="Tape and Reel", Radiation Hardening=No, RoHS Compliant=Yes, Series=EXB, Size Code=0603, Technology="THICK FILM", Terminal Pitch=0.8mm, Termination=Convex, Tolerance=5%, Width=1.6mm
SW1 SW2 SW3 SW4: library part CMP-2000-07503-1, "Switch, SPST, 24 V, -35 to 85 degC, 4-Pin SMD, RoHS, Tape and Reel", Case\/Package=SMD/SMT, Contact Current Rating=50mA, Contact Resistance=100mOhm, Insulation Resistance=100MOhm, manufacturer="TE Connectivity", Max Operating Temperature=85degC, Max Voltage Rating (DC)=12V, Min Operating Temperature=-35degC, Operating Force=1.57N, Package Description="4-Pin Surface Mount Device, Body 6 x 6 mm, Pitch 4.5 mm", Package Quantity=750, Voltage Rating=24V, Actuator Length=3.4mm, Actuator Material=Polyamide, Contact Material=CopperAlloy, Contact Plating=Silver, Current Rating=50mA, Datasheet URL=http://www.te.com/commerce/DocumentDelivery/DDEController?Action=showdoc&DocId=Customer+Drawing%7F2-1437565-7%7FV%7Fpdf%7FEnglish%7FENG_CD_2-1437565-7_V.pdf%7F4-1437565-9, Datasheet Version="Rev. V, 02/2015", Electrical Life=100000Cycles, ELV=Compliant, Illumination Type=Illuminated, Lead Free=LeadFree, Length=6mm, Manufacturer URL=http://www.te.com/, Mechanical Life=100000Cycles, Mount=SurfaceMount, Mounting Technology=SurfaceMount, Orientation=Straight, Package Reference=FSM6JSMA, Packaging=LoosePiece, REACH SVHC=Unknown, RoHSCompliant=true, Switch Travel=0.25mm, Termination=GullWing, Throw Configuration=SPST, Voltage Rating (DC)=24V, Width=6mm
U1: "No Description Available", Mfr_Name=STMicroelectronics, Copyright="Copyright (C) 2023 Ultra Librarian. All rights reserved.", Manufacturer_Part_Number=STM32F411CCU6TR, RefDes=RefDes, Type=DEV
U7: "Linear Voltage Regulator IC 1 Output 500mA SOT-23-5", Package="SOT-23-5 Richtek", Availability=Unavailable, MF="Richtek USA", MP=RT9013-33GB, price=None, SnapEDA_Link=https://www.snapeda.com/parts/RT9013-33GB/Richtek%20USA%20Inc./view-part/553199/?ref=snap
XF1: library part CMP-1502-00236-1, manufacturer="Wurth Elektronik", Operating Temperature=-30to120degC, Package Reference=696107003002, Datasheet URL=https://katalog.we-online.de/em/datasheet/696107003002.pdf, Fuse Size=5x20mm, Manufacturer URL=http://www.we-online.de, Mounting Technology=THT, Packaging=Box, Part Number=696107003002, Publisher=WurthElektronik
Y1: library part CMP-27762-013661-2, "Crystal 32.768kHz ±20ppm (Tol) 9pF FUND 70kΩ 2-Pin CSMD T/R", Case/Package=CSMD, ESR (Equivalent Series Resistance)=70kR, Frequency=32.768kHz, Frequency Stability=20ppm, Insulation Resistance=500MR, Load Capacitance=9pF, Max Operating Temperature=85°C, Min Operating Temperature=-40°C, Operating Frequency="32.768 kHz", Package Quantity=3000, Depth=1.5mm, Frequency Tolerance=20ppm, Height=0.9mm, Lead Free="Lead Free", Length=3.2mm, Mount="Surface Mount", Number of Pins=2, Packaging="Tape and Reel", Radiation Hardening=No, REACH SVHC="No SVHC", RoHS Compliant=Yes, Series=ABS07, Series Resistance=70kR, Termination=SMD/SMT, Tolerance=20ppm, Width=1.5mm

## Free pads (board coordinates)
  round 60 hole 125.98 unplated: 2(4740,4092.68) 2(4740,5510) 2(6708.5,4092.68) 2(6708.5,5510)

## Via types
v1: diameter 25, hole 15, Top Layer to Bottom Layer, 142 vias

## Nets (pads, with @x,y where several pads share a name; then routed paths per layer and width w, separated by ;. In a path a pad name is that pad's centre, name@x,y a point inside that pad or via, vN(x,y) a via of type N, cw(c..) or ccw(c..) an arc to the next point about the centre after c; other vN are vias at no path point)
+3.3: C5.2 C6.2 C7.2 C8.2 C23.2 P1.1 Q1.2 Q1.5 Q2.2 Q2.5 Q3.2 Q3.5 Q4.2 Q4.5 Q5.2 Q5.5 Q6.2 Q6.5 Q7.2 Q7.5 Q8.2 Q8.5 R6.2 R7.2 R8.2 RN1.3 RN1.4 RN2.3 RN2.4 RN3.3 RN3.4 RN4.3 RN4.4 RN5.3 RN5.4 RN6.3 RN6.4 RN7.3 RN7.4 RN8.3 RN8.4 U1.9 U1.24 U1.36 U1.48 U7.5 | length 16556.1
  Top Layer w10: RN7.4@2890.39,3204.88 RN7.3@2921.89,3204.88 2921.89,3221.89 cw(c2960,3221.89) v1(2960,3260) ; Q7.2@2947.64,2956.74 Q7.2@2948.88,2951.14 ; Q7.2@2947.64,2956.97 Q7.5@2947.64,3029.8 ; Q7.2@2948.88,2951.12 cw(c2938.91,2951.86) 2948.85,2950.84 ccw(c2982.51,2947.24) v1@2982.51,2913.39 ; v1(2982.56,2913.39) 3154.18,2913.39 ccw(c3154.18,2954.53) 3193.14,2941.33 cw(c3202.59,2938.06) 3194.33,2943.68 3196.78,2947.32 ccw(c3188.5,2952.92) 3198.34,2951.14 3199.53,2951.14 Q8.2@3197.64,2956.97 Q8.5@3197.64,3029.8 ; RN8.4@3140.39,3204.88 RN8.3@3171.89,3204.88 3171.89,3221.89 cw(c3210,3221.89) v1(3210,3260) 3210,3754.45 cw(c3214.78,3754.45) v1(3214.78,3759.23) ; RN5.4@3736.3,3204.88 RN5.3@3767.8,3204.88 3767.8,3221.89 cw(c3805.91,3221.89) v1(3805.91,3260) ; Q5.2@3793.54,2956.74 Q5.2@3794.78,2951.14 ; Q5.2@3793.54,2956.97 Q5.5@3793.54,3029.8 ; Q5.2@3794.78,2951.12 cw(c3784.81,2951.86) 3794.76,2950.84 ccw(c3828.42,2947.24) v1@3828.42,2913.39 ; v1(3828.46,2913.39) 4000.08,2913.39 ccw(c4000.08,2954.53) 4039.05,2941.33 cw(c4048.5,2938.06) 4040.23,2943.68 4042.69,2947.32 ccw(c4034.4,2952.92) 4044.24,2951.14 4045.43,2951.14 Q6.2@4043.54,2956.97 Q6.5@4043.54,3029.8 ; RN6.4@3986.3,3204.88 RN6.3@4017.8,3204.88 4017.8,3221.89 cw(c4055.91,3221.89) v1(4055.91,3260) ; U7.5@4354.02,4127.01 cw(c4355.43,4127.01) U7.5@4355.43,4128.43 ; C7.2@4570,2084.25 4590,2084.25 cw(c4590,2081.73) 4592.52,2081.73 U1.48@4674,2081.73 ; C8.2@4684.25,2410 4684.25,2343.48 ccw(c4701.73,2343.48) U1.36@4701.73,2326 ; C6.2@4855.75,1930 4858.62,1932.87 4858.62,1940.11 4859.21,1940.7 U1.9@4859.21,2054 ; U1.24@4946,2298.27 cw(c4947.73,2298.27) U1.24@4947.73,2300 ; RN3.4@5543.7,3204.88 RN3.3@5575.2,3204.88 5575.2,3221.89 cw(c5613.31,3221.89) v1(5613.31,3260) ; Q3.2@5600.94,2956.74 Q3.2@5602.18,2951.14 ; Q3.2@5600.94,2956.97 Q3.5@5600.94,3029.8 ; Q3.2@5602.18,2951.12 cw(c5592.21,2951.86) 5602.16,2950.84 ccw(c5635.82,2947.24) v1@5635.82,2913.39 ; v1@5610,3263.31 v1(5610,3700) ; v1(5635.86,2913.39) 5807.48,2913.39 ccw(c5807.48,2954.53) 5846.45,2941.33 cw(c5855.9,2938.06) 5847.63,2943.68 5850.09,2947.32 ccw(c5841.8,2952.92) 5851.64,2951.14 5852.83,2951.14 Q4.2@5850.94,2956.97 Q4.5@5850.94,3029.8 ; RN4.4@5793.7,3204.88 RN4.3@5825.2,3204.88 5825.2,3221.89 cw(c5863.31,3221.89) v1(5863.31,3260) ; RN1.4@6391.18,3204.88 RN1.3@6422.68,3204.88 6422.68,3221.89 cw(c6460.79,3221.89) v1(6460.79,3260) cw(c6460.79,3260.79) 6460,3260.79 v1(6460,3700) ; Q1.2@6448.43,2956.74 Q1.2@6449.66,2951.14 ; Q1.2@6448.43,2956.97 Q1.5@6448.43,3029.8 ; Q1.2@6449.66,2951.12 cw(c6439.69,2951.86) 6449.64,2950.84 ccw(c6483.3,2947.24) v1(6483.34,2913.39) ; v1(6483.34,2913.39) 6654.97,2913.39 ccw(c6654.97,2954.53) 6693.93,2941.33 cw(c6703.38,2938.06) 6695.11,2943.68 6697.57,2947.32 ccw(c6689.28,2952.92) 6699.12,2951.14 6700.31,2951.14 Q2.2@6698.43,2956.97 Q2.5@6698.43,3029.8 ; RN2.4@6641.18,3204.88 RN2.3@6672.68,3204.88 6672.68,3221.89 cw(c6710.79,3221.89) v1(6710.79,3260)
  Top Layer w20: v1(3730,3760) v1(3910,3760) ; P1.1@4390,1890 4470,1890 ccw(c4470,1990) 4570,1990 C7.2@4570,2084.25 ; C23.2@4440,4128.43 ccw(c4498.43,4128.43) v1@4498.43,4070 ; v1(4490,3760) v1(4490,3860) ; v1@4540,2780 4540,2510 ccw(c4640,2510) 4640,2410 C8.2@4684.25,2410 ; C6.2@4855.75,1930 4950,1930 ; v1(4950,1750) 4950,1930 ; U1.24@4950,2302.16 cw(c5026.59,2302.16) 5026.59,2378.75 C5.2@5060,2378.75 5060,2530 cw(c5100,2530) v1(5100,2570) ; v1(5157.5,1930) 4950,1930 ; v1@5610,3263.31 ccw(c5613.31,3263.31) v1(5613.31,3260)
  Top Layer w30: U7.5@4355.43,4128.43 C23.2@4440,4128.43
  Bottom Layer w10: v1(2982.56,2913.39) cw(c2982.56,3005.94) 2890,3005.94 2890,3190 cw(c2960,3190) v1(2960,3260) v1(3210,3260) ; v1(3828.46,2913.39) cw(c3828.46,3005.94) 3735.91,3005.94 3735.91,3190 cw(c3805.91,3190) v1(3805.91,3260) v1(4055.91,3260) 4140,3260 ccw(c4140,3360) 4240,3360 4240,3760 ; R7.2@4745,1762.64 ccw(c4755,1762.64) R7.2@4755,1752.64 ; v1(5635.86,2913.39) cw(c5635.86,3005.94) 5543.31,3005.94 5543.31,3190 cw(c5613.31,3190) v1(5613.31,3260) v1(5863.31,3260) ; v1(6483.34,2913.39) cw(c6483.34,3005.94) 6390.79,3005.94 6390.79,3190 cw(c6460.79,3190) v1(6460.79,3260) v1(6710.79,3260)
  Bottom Layer w20: v1(3214.78,3759.23) cw(c3215.55,3759.23) 3215.55,3760 v1(3730,3760) ; v1(3910,3760) 4240,3760 v1(4490,3760) ; P1.1@4390,1890 cw(c4390,1850) 4430,1850 R8.2@4430,1762.64 R7.2@4745,1762.64 ; v1(4490,3860) v1(4490,4070) ; R7.2@4755,1752.64 R6.2@5010,1752.64 ; v1(5100,2570) 5155.69,2570 ; v1(5157.5,1930) 5157.5,2540 ccw(c4907.5,2540) 5155.75,2569.5 5155.75,2570 5155.69,2570 ; v1(5610,3700) ccw(c5550,3700) 5550,3760 ; v1@6459.04,3700.96 v1(6460,3700) 6460,3732.43 ccw(c6432.43,3732.43) 6432.43,3760 5550,3760 ; v1(4490,3760) ccw(c4490,3690) 4420,3690 4420,2890 ccw(c4520,2890) 4520,2790 v1(4540,2790) 4907.5,2790 cw(c4907.5,2540) 5155.69,2570 ; v1(4490,3760) 5550,3760
+5: C9.2 C10.2 C11.2 C12.2 C17.2 C18.2 C22.2 L1.2 R9.2 RN1.1 RN1.2 RN2.1 RN2.2 RN3.1 RN3.2 RN4.1 RN4.2 RN5.1 RN5.2 RN6.1 RN6.2 RN7.1 RN7.2 RN8.1 RN8.2 U2.5 U3.5 U4.5 U5.5 U7.1 U7.3 | length 13942.5
  Top Layer w10: RN7.2@2953.39,3204.88 RN7.1@2984.88,3204.88 ; v1(3010,3810) 2987.5,3787.5 2987.5,3207.5 RN7.1@2984.88,3204.88 ; v1(3040,3210) 3035.94,3210 3030.82,3204.88 RN7.1@2984.88,3204.88 ; R9.2@3130,4447.36 3130,4075 ccw(c3230,4075) 3230,3975 3810,3975 ccw(c3810,4011.57) 3846.57,4011.57 C18.2@3846.57,4080 ; U5.5@3187.64,2383.39 3277.64,2383.39 ccw(c3277.64,2483.39) 3377.64,2483.39 3377.64,3043.39 ; RN8.2@3203.39,3204.88 RN8.1@3234.88,3204.88 3277.64,3204.88 cw(c3277.64,3104.88) 3377.64,3104.88 3377.64,3043.39 ; C12.2@3417.64,3039.13 3381.89,3039.13 cw(c3381.89,3043.39) 3377.64,3043.39 ; RN5.2@3799.29,3204.88 RN5.1@3830.79,3204.88 ; v1(3840,3650) ccw(c3840,3645.91) 3835.91,3645.91 3835.91,3210 cw(c3830.79,3210) RN5.1@3830.79,3204.88 ; v1(3885.91,3210) 3881.85,3210 3876.73,3204.88 RN5.1@3830.79,3204.88 ; U4.5@4033.54,2383.39 4123.54,2383.39 ccw(c4123.54,2483.39) 4223.54,2483.39 4223.54,3043.39 ; RN6.2@4049.29,3204.88 RN6.1@4080.79,3204.88 4123.54,3204.88 cw(c4123.54,3104.88) 4223.54,3104.88 4223.54,3043.39 ; U7.3@4255.98,4052.99 4267.99,4052.99 ccw(c4267.99,4095) 4310,4095 ccw(c4277.99,4095) 4277.99,4127.01 U7.1@4255.98,4127.01 ; C11.2@4263.54,3039.13 4227.8,3039.13 cw(c4227.8,3043.39) 4223.54,3043.39 ; RN3.2@5606.69,3204.88 RN3.1@5638.19,3204.88 ; v1(5640,3810) 5640,3509.75 5640.81,3508.95 5640.81,3207.5 RN3.1@5638.19,3204.88 ; v1(5693.31,3210) 5689.25,3210 5684.13,3204.88 RN3.1@5638.19,3204.88 ; U3.5@5840.94,2383.39 5930.94,2383.39 ccw(c5930.94,2483.39) 6030.94,2483.39 6030.94,3043.39 ; RN4.2@5856.69,3204.88 RN4.1@5888.19,3204.88 5930.94,3204.88 cw(c5930.94,3104.88) 6030.94,3104.88 6030.94,3043.39 ; C10.2@6070.94,3039.13 6035.2,3039.13 cw(c6035.2,3043.39) 6030.94,3043.39 ; RN1.2@6454.17,3204.88 RN1.1@6485.67,3204.88 ; v1(6480,3810) 6480,3805.94 6488.29,3797.65 6488.29,3207.5 RN1.1@6485.67,3204.88 ; v1(6540.79,3210) 6536.73,3210 6531.61,3204.88 RN1.1@6485.67,3204.88 ; U2.5@6688.43,2383.39 6778.43,2383.39 ccw(c6778.43,2483.39) 6878.43,2483.39 6878.43,3043.39 ; RN2.2@6704.17,3204.88 RN2.1@6735.67,3204.88 6778.43,3204.88 cw(c6778.43,3104.88) 6878.43,3104.88 6878.43,3043.39 ; C9.2@6918.43,3039.13 6882.68,3039.13 cw(c6882.68,3043.39) 6878.43,3043.39
  Bottom Layer w10: v1(3040,3210) cw(c3040,3170) 3080,3170 ccw(c3110,3170) 3110,3140 3262.82,3140 ccw(c3262.82,3196.01) v1(3318.82,3196.01) v1@3314.76,3196.01 ; v1(3840,3650) 3840,3810 ; v1(3885.91,3210) cw(c3885.91,3170) 3925.91,3170 ccw(c3955.91,3170) 3955.91,3140 4108.72,3140 ccw(c4108.72,3196.01) v1(4164.73,3196.01) v1@4160.67,3196.01 ; v1(5693.31,3210) cw(c5693.31,3170) 5733.31,3170 ccw(c5763.31,3170) 5763.31,3140 5916.12,3140 ccw(c5916.12,3196.01) v1(5972.13,3196.01) v1@5968.07,3196.01 ; v1(6540.79,3210) cw(c6540.79,3170) 6580.79,3170 ccw(c6610.79,3170) 6610.79,3140 6763.6,3140 ccw(c6763.6,3196.01) v1(6819.61,3196.01) v1@6815.55,3196.01
  Bottom Layer w20: v1(3010,3810) 3840,3810 ; v1(3930,4060) 3930,3900 cw(c3840,3900) 3840,3810 ; v1(6480,3810) v1(5640,3810) 3840,3810
+12: 12V.1 12V.3 C19.1 C20.1 C21.1 C24.2 C25.2 U6.3 U6.5 XF1.2 | length 425.7
  Top Layer w10: U6.5@3297.76,4473.58 3333.78,4473.58 ccw(c3333.78,4484.8) 3345,4484.8 3345,4488.58 cw(c3349.51,4488.58) 3345,4488.69 3349.32,4493.01 3349.51,4493.09 3352.36,4494.28 3360.44,4502.36 3371.65,4502.36 3373.51,4503.14 U6.3@3392.24,4510.98
  Top Layer w50: 4500,4845 cw(c4504.92,4845) 4504.92,4849.92 12V.1@4710.94,4849.92 12V.3@4810.94,4849.92
BUTTON_1: C15.1 SW4.3 U1.26 | length 2271.1
  Top Layer w10: U1.26@4898.58,2326 4898.58,2478.13 4906.4,2485.94 v1(4906.4,2490)
  Bottom Layer w10: C15.1@4444.25,1160 cw(c4444.25,1228.43) 4375.83,1228.43 SW4.3@4375.83,1255.87 4375.83,1412.92 cw(c4475.83,1412.92) 4475.83,1512.92 5043.5,1512.92 ccw(c5043.5,1539.41) 5070,1539.41 5070,2110 ccw(c5010,2110) 5010,2170 5006.4,2170 cw(c5006.4,2270) 4906.4,2270 v1(4906.4,2490)
BUTTON_2: C14.1 SW3.3 U1.27 | length 2100.7
  Top Layer w10: U1.27@4878.9,2326 4878.9,2518.9 v1(4880,2520)
  Bottom Layer w10: C14.1@4764.25,1160 cw(c4764.25,1233.43) 4690.83,1233.43 SW3.3@4690.83,1255.87 4690.83,1380 cw(c4790.83,1380) 4790.83,1480 5040,1480 ccw(c5040,1540) 5100,1540 5100,2150 ccw(c5040,2150) 5040,2210 4990,2210 cw(c4990,2240) 4960,2240 4960,2483.07 ccw(c4925.43,2483.07) 4948.27,2509.03 cw(c4954.97,2516.45) 4947.6,2509.69 ccw(c4940.27,2502.89) 4942.6,2512.61 ccw(c4880,2251.06) v1(4880,2520)
BUTTON_3: C13.1 SW2.3 U1.29 | length 1930.5
  Top Layer w10: U1.29@4839.53,2326 4839.53,2539.93 4844.82,2545.22 v1(4844.82,2549.28)
  Bottom Layer w10: v1(4844.82,2549.28) 4950.72,2549.28 cw(c4950.72,2510) 4990,2510 4990,2290 ccw(c5040,2290) 5040,2240 cw(c5040,2150) 5130,2150 5130,1510 cw(c5070,1510) 5070,1450 ccw(c5070,1385.83) 5005.83,1385.83 SW2.3@5005.83,1255.87 5005.83,1224.17 ccw(c5070,1224.17) C13.1@5070,1160
GND: 12V.2 12V.4 BT1.1 C1.2 C2.2 C3.1 C4.2 C5.1 C6.1 C7.1 C8.1 C9.1 C10.1 C11.1 C12.1 C13.2 C14.2 C15.2 C17.1 C18.1 C19.2 C20.2 C21.2 C22.1 C23.1 C24.1 C25.1 HV.2 HV.4 P1.8 POWER.2 R1.1 R10.1 SW1.3 SW1.4 SW2.1 SW3.1 SW4.1 U1.8 U1.23 U1.35 U1.47 U1.49 U2.12 U3.12 U4.12 U5.12 U6.1 U7.2 | length 614
  Top Layer w10: R10.1@3190,4447.36 3190,4380 ccw(c3290,4380) 3290,4280 3400,4280 ; C7.1@4570,2115.75 4638.13,2115.75 cw(c4638.09,2105.75) 4647.13,2110.03 ccw(c4658,2115.1) 4658,2103.1 4668.44,2103.1 cw(c4668.44,2093.1) 4669.88,2103 4669.88,2102.42 U1.47@4674,2101.42 ; C6.1@4824.25,1930 4827.13,1930.27 ccw(c4824.25,1945.75) 4827.44,1930.33 ccw(c4825.39,1940.11) 4834.87,1936.93 cw(c4855.75,1930) 4835.27,1938.05 ccw(c4825.95,1941.66) 4835.91,1940.81 cw(c4847.87,1939.84) 4838.15,1946.87 ccw(c4830,1952.67) 4840,1952.62 4840,2000 4839.53,2000 U1.8@4839.53,2054 ; U1.23@4946,2278.58 4950.03,2277.58 U1.23@4950.03,2277.01
  Bottom Layer w10: SW4.1@4552.99,1237.24 SW4.1@4552.99,1255.87 ; SW2.1@5182.99,1241.5 SW2.1@5182.99,1255.87
  other v1: 4610,2120 5110,2330 4085,4065 4195,4065 3660,4120 3700,4120 3740,4120 3590,4340 3700,4340 3590,4380 3700,4380
HV: HV.1 HV.3 R2.1 R3.1 R4.1 R5.1 | length 13053
  Top Layer w20: R5.1@2700,1902.01 2700,3300 2700,3819.13 cw(c2800,3819.13) 2800,3919.13 3645.91,3919.13 ; R4.1@3545.91,1902.01 3545.91,3300 3545.91,3819.13 cw(c3645.91,3819.13) 3645.91,3919.13 ; R3.1@5353.31,1902.01 5353.31,3300 5353.31,3820 cw(c5453.31,3820) 5440.12,3919.13 3645.91,3919.13 ; 5453.31,3920 6200.79,3920 ; R2.1@6200.79,1902.01 6200.79,3300 6200.79,3920 ; HV.3@6750.94,4849.92 HV.1@6650.94,4849.92 6300.79,4849.92 ccw(c6300.79,4749.92) 6200.79,4749.92 6200.79,3920
IC1_A: Q1.6 RN1.7 U2.3 | length 1738.3
  Top Layer w10: Q1.6@6422.83,3029.8 6424.72,3035.63 6427.02,3044.42 cw(c6441.54,3040.63) 6432.89,3052.89 6444.27,3060.91 ccw(c6428.43,3083.39) 6455.93,3083.4 RN1.7@6455.93,3131.14 ; RN1.7@6454.17,3141.89 6460.79,3141.89 ccw(c6451.81,3146.3) 6461.81,3146.25 6461.81,3157.64 cw(c6476.81,3157.64) 6476.81,3172.64 6494.53,3172.64 cw(c6494.53,3157.64) 6509.53,3157.64 6509.53,3134.85 ccw(c6519.53,3134.89) 6514.14,3126.47 cw(c6460.79,3041.89) 6560.79,3041.89 v1(6560.79,3040) ; U2.3@6688.43,2183.39 6838.43,2183.39 ccw(c6838.43,2283.39) 6938.43,2283.39 v1(6938.43,2833.39)
  Bottom Layer w10: v1(6560.79,3040) 6558.43,3037.64 6558.43,2933.39 ccw(c6658.43,2933.39) 6658.43,2833.39 v1(6938.43,2833.39)
IC1_B: Q1.3 RN1.8 U2.6 | length 1200.2
  Top Layer w10: Q1.3@6474.02,2956.97 6502.01,2956.97 ccw(c6502.01,2983.39) 6528.43,2983.39 v1(6528.43,3013.39) 6528.43,3081.61 ; RN1.8@6485.67,3141.89 6485.67,3126.14 ccw(c6508.43,3126.14) 6508.27,3103.39 ; 6508.3,3103.39 cw(c6508.14,3093.39) 6515.68,3099.95 6525.97,3088.13 cw(c6518.42,3081.57) 6528.42,3081.66 ; U2.6@6688.43,2483.39 6748.43,2483.39 ccw(c6748.43,2583.39) 6848.43,2583.39 v1(6848.43,2773.39)
  Bottom Layer w10: v1(6528.43,3013.39) 6528.43,2813.39 ccw(c6568.43,2813.39) 6568.43,2773.39 v1(6848.43,2773.39)
IC1_C: Q2.6 RN2.7 U2.7 | length 927.6
  Top Layer w10: Q2.6@6672.83,3029.8 6674.72,3035.63 6677.02,3044.42 cw(c6691.54,3040.63) 6682.89,3052.89 6694.27,3060.91 ccw(c6678.43,3083.39) 6705.93,3083.4 6705.93,3131.14 RN2.7@6704.17,3141.89 6706.08,3152.64 6706.08,3152.69 cw(c6735.67,3141.89) 6712.39,3163.11 ccw(c6704.98,3169.82) 6713.7,3164.93 cw(c6726.81,3157.64) 6726.81,3172.64 6727.87,3172.64 ccw(c6727.83,3182.64) 6729.68,3172.81 cw(c6735.67,3141.89) 6735.67,3173.39 6778.43,3173.39 cw(c6778.43,3133.39) 6818.43,3133.39 6818.43,2683.39 cw(c6718.43,2683.39) 6718.43,2583.39 U2.7@6688.43,2583.39
  Bottom Layer w10: U2.7@6688.43,2583.39 U2.7@6698.43,2583.39
IC1_D: Q2.3 RN2.8 U2.4 | length 1285.6
  Top Layer w10: U2.4@6688.43,2283.39 6808.43,2283.39 ccw(c6808.43,2383.39) 6908.43,2383.39 v1(6908.43,2803.39) ; v1(6728.43,2803.39) cw(c6728.43,2807.8) 6724.02,2807.8 Q2.3@6724.02,2956.97 6752.01,2956.97 ccw(c6752.01,2983.39) 6778.43,2983.39 6778.43,3083.39 ccw(c6758.43,3083.39) 6758.43,3103.39 cw(c6758.43,3126.14) 6735.67,3126.14 RN2.8@6735.67,3141.89
  Bottom Layer w10: v1(6728.43,2803.39) v1(6908.43,2803.39)
IC2_A: Q3.6 RN3.7 U3.3 | length 1738.3
  Top Layer w10: Q3.6@5575.35,3029.8 5577.24,3035.63 5579.54,3044.42 cw(c5594.06,3040.63) 5585.41,3052.89 5596.79,3060.91 ccw(c5580.94,3083.39) 5608.44,3083.4 RN3.7@5608.44,3131.14 ; RN3.7@5606.69,3141.89 5613.31,3141.89 ccw(c5604.33,3146.3) 5614.33,3146.25 5614.33,3157.64 cw(c5629.33,3157.64) 5629.33,3172.64 5647.05,3172.64 cw(c5647.05,3157.64) 5662.05,3157.64 5662.05,3134.85 ccw(c5672.05,3134.89) 5666.66,3126.47 cw(c5613.31,3041.89) 5713.31,3041.89 v1(5713.31,3040) ; U3.3@5840.94,2183.39 5990.94,2183.39 ccw(c5990.94,2283.39) 6090.94,2283.39 v1(6090.94,2833.39)
  Bottom Layer w10: v1(5713.31,3040) 5710.94,3037.64 5710.94,2933.39 ccw(c5810.94,2933.39) 5810.94,2833.39 v1(6090.94,2833.39)
IC2_B: Q3.3 RN3.8 U3.6 | length 1200.2
  Top Layer w10: Q3.3@5626.54,2956.97 5654.53,2956.97 ccw(c5654.53,2983.39) 5680.94,2983.39 v1(5680.94,3013.39) 5680.94,3081.61 ; RN3.8@5638.19,3141.89 5638.19,3126.14 ccw(c5660.94,3126.14) 5660.79,3103.39 cw(c5660.66,3093.39) 5668.2,3099.95 5678.49,3088.13 cw(c5670.94,3081.57) 5680.94,3081.66 ; U3.6@5840.94,2483.39 5900.94,2483.39 ccw(c5900.94,2583.39) 6000.94,2583.39 v1(6000.94,2773.39)
  Bottom Layer w10: v1(5680.94,3013.39) 5680.94,2813.39 ccw(c5720.94,2813.39) 5720.94,2773.39 v1(6000.94,2773.39)
IC2_C: Q4.6 RN4.7 U3.7 | length 927.6
  Top Layer w10: Q4.6@5825.35,3029.8 5827.24,3035.63 5829.54,3044.42 cw(c5844.06,3040.63) 5835.41,3052.89 5846.79,3060.91 ccw(c5830.94,3083.39) 5858.44,3083.4 5858.44,3131.14 RN4.7@5856.69,3141.89 5858.6,3152.64 5858.6,3152.69 cw(c5888.19,3141.89) 5864.91,3163.11 ccw(c5857.5,3169.82) 5866.22,3164.93 cw(c5879.33,3157.64) 5879.33,3172.64 5880.39,3172.64 ccw(c5880.35,3182.64) 5882.2,3172.81 cw(c5888.19,3141.89) 5888.19,3173.39 5930.94,3173.39 cw(c5930.94,3133.39) 5970.94,3133.39 5970.94,2683.39 cw(c5870.94,2683.39) 5870.94,2583.39 U3.7@5840.94,2583.39
  Bottom Layer w10: U3.7@5840.94,2583.39 U3.7@5850.94,2583.39